# Altium PCB board.PcbDoc (part 2 of 2)
Units mil, origin at the board's own origin, x right, y up, seen from the top; angles counter-clockwise.
Board outline 6805.03 x 3220.03 mil, 2 copper layers (Top Layer, Bottom Layer); 97 components, 65 nets, 363 pads, 67 vias.
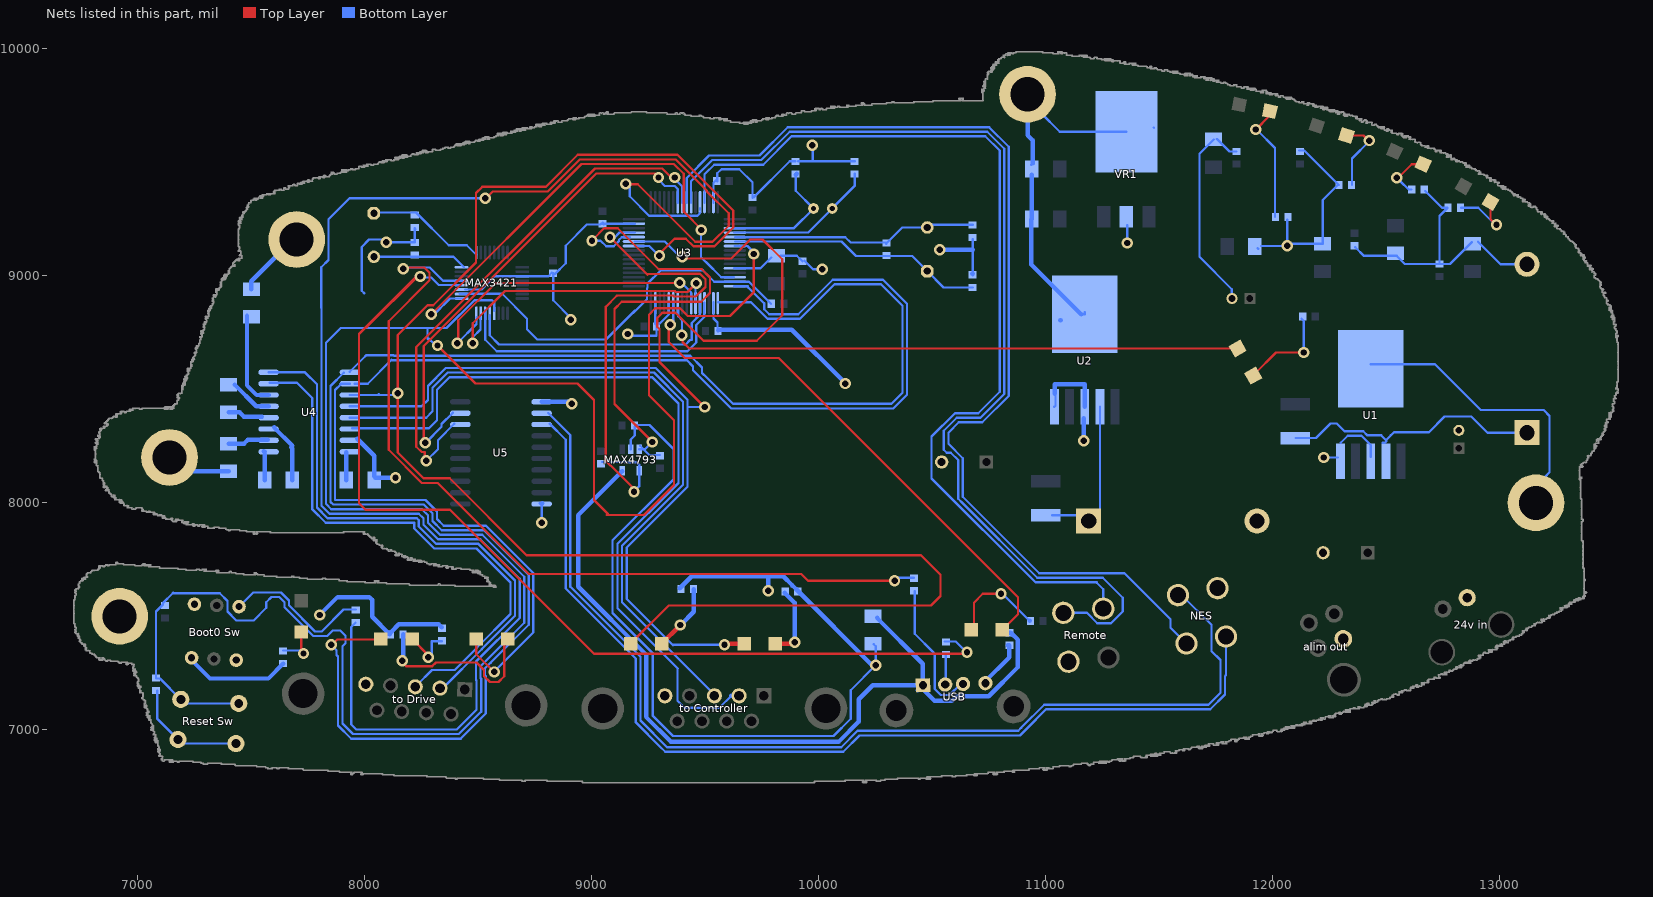
[diagram p2: the nets of this part, all layers, seen from the top]

## Via types
v1: diameter 50, hole 28, Top Layer to Bottom Layer, 67 vias

## Nets (pads, with @x,y where several pads share a name; then routed paths per layer and width w, separated by ;. In a path a pad name is that pad's centre, name@x,y a point inside that pad or via, vN(x,y) a via of type N, cw(c..) or ccw(c..) an arc to the next point about the centre after c; other vN are vias at no path point) (continued)
GND: "24v in.2" "alim out.3" "Boot0 Sw.1" "Boot0 Sw.6" "Reset Sw.1" "to Controller.5" "to Drive.5" C1.2 C2.2 C3.1 C4.2 C5.2 C6.2 C7.2 C8.1 C9.2 C10.2 C11.2 C12.1 C13.2 C14.1 C15.1 C16.1 C17.1 C18.1 C19.1 C20.1 C21.1 C22.1 C23.1 C24.1 C25.2 C26.2 C27.2 C29.2 C31.1 C32.2 C33.1 C34.2 C35.1 C36.2 C37.2 C38.2 D2.1 D4.1 MAX3421.3 MAX3421.19 MAX4793.2 NES.4 R1.1 R2.1 R3.1 R4.1 R7.1 R17.1 R18.1 R19.1 Remote.1 T1.1 T2.1 T3.1 T4.1 T5.1 U1.3 U1.5 U2.3 U2.5 U3.12 U3.18 U3.28 U3.31 U3.47 U3.63 U4.15 U5.1 U5.10 USB.4 VR1.2 | length 17597
  Bottom Layer w10: C17.1@7085,7173 7085,7049.27 7176.93,6957.33 ; 7188.48,6939.48 7432.21,6939.48 ; T3.1@7715,9212 T3.1@7735.44,9232.44 ; 7999.04,8921.76 7986,8934.8 7986,9127.6 8018.6,9160.2 8096.2,9160.2 v1@8098.7,9157.7 ; v1@8113.44,9147.56 C32.2@8220,9147.56 C34.2@8220,9203 ; C34.2@8220,9210 C34.2@8220,9203 ; C34.2@8222,9205 C34.2@8220,9203 ; MAX3421.19@8442.9,8939.7 8514.8,8939.7 8573.63,8998.53 8683.03,8998.53 8808.93,8998.53 C37.2@8823.9,9013.5 ; 8657.6,8999.3 8657.6,8998.5 MAX3421.3@8697.5,8998.5 ; U5.10@8770.1,7999.1 8779,7990.2 v1(8779,7912) ; C37.2@8830,9011.44 8830,8892.3 v1@8907.8,8814.5 ; C37.2@8838,9008 8885,9055 8885,9133 8977,9225 ; 8978,9226 9037,9226 9040.44,9229.44 C22.1@9048,9229.44 ; C22.1@9046,9232 C22.1@9049,9235 ; C22.1@9053,9227 9055.95,9229.95 U3.47@9189.5,9229.95 ; v1@9165,8736.56 9285.56,8736.56 C23.1@9285.56,8777 C23.1@9285.56,8788.56 ; MAX4793.2@9171.13,8236 9171.13,8279.13 9189,8297 C33.1@9189,8336 ; C33.1@9194,8343 9254,8343 9360,8237 9360,8103.16 9091.47,7834.63 9091.47,7514.49 9268.01,7337.95 9268.01,7062.92 9357.77,6973.16 10064.8,6973.16 10140.63,7048.99 10140.63,7174.63 v1(10251,7285) 10251,7368 C38.2@10242,7377 ; U3.31@9280.05,8883.5 9280.05,8787.95 C23.1@9283,8785 ; C23.1@9297.6,8788.4 9339.1,8829.9 U3.28@9339.1,8879.56 ; U3.28@9339,8842 U3.28@9339,8857 ; U3.18@9535.95,8883.5 9535.95,8812.05 9554,8794 C24.1@9554,8765 ; U3.63@9535.95,9320.5 9535.95,9409.95 C21.1@9548,9422 ; C21.1@9553,9417 9553,9452 9571,9470 9650,9470 9708,9412 C20.1@9708,9344.56 ; U3.12@9626.5,9033.1 9743.1,9033.1 C25.2@9791,9081 ; C20.1@9713,9345 9872.56,9504.56 C18.1@9898,9504.56 ; C25.2@9833,9089 9903.56,9089 C26.2@9928,9064.56 ; C18.1@9909.56,9504.56 9974,9504.56 ; C26.2@9937,9067 9975,9029 v1(10015,9029) ; v1@9974,9569 9974,9504.56 ; C19.1@10158,9504.56 9974,9504.56 ; C16.1@10678,9002 10678,9010 10678,9115 ; 10678,9122 10678,9115 ; C15.1@10678,9162 10678,9115 ; C36.2@10935,9488 C36.2@10942,9495 ; T2.1@10979,9718 11061.92,9635.08 VR1.2@11355,9635.08 ; U2.5@11037.81,8422.83 11043,8428.02 U2.5@11043,8481 ; U2.3@11155.69,8830.31 U2.3@11171.81,8830.31 U2.3@11171.81,8839.19 ; v1(11359,9145) VR1.2@11359,9224 ; VR1.2@11476,9654 VR1.2@11477,9653 ; C13.2@11740,9601.02 11677,9538.02 11677,9084 11820,8941 C9.2@11820,8909 ; C13.2@11754,9603 11809.44,9547.56 C14.1@11840,9547.56 ; C4.2@11933,9122 C4.2@11936,9119 ; C4.2@11949,9132 v1(12064,9132) R4.1@12064,9247 ; v1@12070,9148.05 12077.02,9141.02 C11.2@12220,9141.02 12220,9334 R3.1@12285,9399 ; C12.1@12116,9552 12138.47,9552 R3.1@12290.47,9400 ; v1(12225,8200) U1.5@12286,8200 ; 12300,8265 12330.59,8295.59 12390.71,8295.59 12431.81,8254.49 U1.3@12431.81,8202.83 ; C8.1@12364,9126 12402,9088 12546,9088 12581.44,9052.56 C3.1@12735,9052.56 ; U1.3@12431.81,8610.31 12714.95,8610.31 12916.33,8408.94 13193.63,8408.94 13219.8,8382.76 13219.8,8134.85 13197,8112.05 T1.1@13197,8057 ; R2.1@12672,9374 12746,9300 R1.1@12770.47,9300 ; R1.1@12770,9299 12735,9264 C3.1@12735,9052.56 ; C1.2@12878,9149 12781.56,9052.56 C3.1@12735,9052.56 ; C1.2@12904,9150 13003.13,9050.87 D2.1@13120,9050.87 ; T1.1@13125,7955 T1.1@13125,8010
  Bottom Layer w19.68: T5.1@7150,8180 7191.02,8138.98 C29.2@7400,8138.98 ; 7181,6932 7188.48,6939.48 ; C31.1@7500,8941.02 7500,8976 T3.1@7608,9084 ; T3.1@7751,9175 T3.1@7756,9170 ; v1@7803,7508 7880,7585 8020,7585 8033,7572 8033,7497.47 R17.1@8110.47,7420 ; U4.15@7967,8282 8041.02,8207.98 8041.02,8116.98 C27.2@8044,8114 ; C27.2@8045,8110 v1(8135,8110) ; R17.1@8115,7430 8150,7465 8325,7465 R19.1@8338,7452 ; U5.10@8779,7996 U5.10@8782,7999 ; U5.1@8779.13,8445 8893,8445 v1@8906,8432 ; R18.1@9387,7624 9440,7677 9777,7677 ; C24.1@9556,8760 9559,8763 9881.3,8763 v1@10111.3,8533 ; 9776,7676 9777,7677 ; v1(9778,7613) 9778,7677 ; v1@9974,9569 v1@9975,9570 ; v1@10249.8,7289.4 10230.13,7289.4 9909.53,7610 9884.09,7635.43 9884.09,7635.94 9843.03,7677 9778,7677 ; v1(10533,9115) 10671,9115 ; 10673,9115 10678,9115 ; C16.1@10676,9010 C16.1@10678,9010 ; USB.4@10728,7208 10840,7320 C35.1@10840,7372.44 C35.1@10833.59,7372.44 ; T2.1@10920,9800 10920,9620 10942,9598 C36.2@10942,9495 ; C5.2@10936,9249 10936,9141 10936,9050 U2.3@11155.69,8830.31 ; C5.2@10938.98,9250 C36.2@10938.98,9445.02 ; U2.5@11039,8481 11039,8520 ; 11040,8523 11171.81,8523 U2.3@11171.81,8422.83 ; U2.3@11063,8804 U2.3@11066,8804 ; v1(11167,8273) U2.3@11167,8373 ; 9777,7677 9778,7677 ; 9777,7677 9778,7678 9778,7677
  other v1: 7801,7506 8912,8436 10117,8525.4 9158,8744 8907.8,8807 8094,9148 9972,9575
Net3.3v_2: 3.3v.2 R1.2 | length 297.8
  Top Layer w10: 3.3v.2@12959.67,9325.55 12959.67,9249.33 v1@12990,9219
  Bottom Layer w10: R1.2@12829.53,9300 12905,9300 v1@12978,9227
  other v1: 12986,9225
Net5v_2: 5v.2 R2.2 | length 208.9
  Top Layer w10: v1@12544,9423 12612.98,9491.98 12649.38,9491.98 5v.2@12649.6,9492.2
  Bottom Layer w10: v1@12561,9418 12599,9380 12610.47,9380 R2.2@12601,9380
  other v1: 12547,9432
Net12v_2: 12v.2 R3.2 | length 338.2
  Top Layer w10: 12v.2@12325.53,9618.71 12400.29,9618.71 v1@12426,9593
  Bottom Layer w10: R3.2@12349.53,9400 12349.53,9517.53 v1@12427,9595
  other v1: 12426,9596
Net24v_2: 24v.2 R4.2 | length 545.7
  Top Layer w10: v1@11924,9643 v1@11926,9645 ; v1@11926,9642 11926,9643 v1@11926,9645 ; v1@11926,9664.28 v1@11926,9645 ; 24v.2@11987.39,9725.68 11987.39,9706.39 v1@11926,9645
  Bottom Layer w10: v1@11932,9642 12010.47,9563.53 R4.2@12010.47,9260
  other v1: 11925,9645
"NetBoot0 Sw_3": "Boot0 Sw.3" R10.1 | length 660.6
  Bottom Layer w10: 7448,7544 7509,7605 7630.85,7605 7666,7569.85 7666,7548.42 7780.85,7433.57 7810.57,7433.57 7906.53,7529.53 R10.1@7960,7529.53
"NetBoot0 Sw_4": "Boot0 Sw.4" R8.1 | length 473.2
  Bottom Layer w19.68: 7230,7314 7318,7226 7575.53,7226 R8.1@7640,7290.47
Netboot0_2: Boot0.2 R8.2 | length 200.6
  Top Layer w10: Boot0.2@7720,7431.1 v1@7720,7353 ; v1@7727,7345 7720,7352 v1@7720,7353 ; v1@7734,7339 7733.5,7339.5 v1@7720,7353
  Bottom Layer w10: R8.2@7640,7349.53 7715.47,7349.53 v1@7727,7338
  other v1: 7730,7336
NetC15_2: C15.2 R9.1 U3.5 Y1.2 | length 1095.9
  Bottom Layer w10: U3.5@9631,9170 10117,9170 10140.47,9146.53 R9.1@10298,9146.53 ; R9.1@10297,9142 10368.06,9213.06 Y1.2@10474.06,9213.06 ; Y1.2@10474,9213 Y1.2@10474.06,9213.06 ; Y1.2@10478,9213.06 Y1.2@10474.06,9213.06 ; C15.2@10678,9224.56 10485.56,9224.56 Y1.2@10474.06,9213.06
NetC16_2: C16.2 R9.2 U3.6 Y1.1 | length 1133.5
  Bottom Layer w10: U3.6@9631,9151 10100,9151 10163.53,9087.47 10298,9087.47 10411.53,9087.47 Y1.1@10480,9019 ; Y1.1@10478,9020.94 10549.94,8949 C16.2@10678,8949
NetC17_2: "Reset Sw.2" C17.2 MAX3421.12 R11.1 U3.7 | length 9492.8
  Top Layer w10: v1(8320,8693) 8487.6,8525.4 8937.1,8525.4 9009.9,8452.6 9009.9,8012.1 9071.2,7950.8 ; 9066,7946 9230,7946 9362,8078 9362,8364 9252,8474 9252,8829 9280,8857 9389,8857 9423,8823 9609,8823 9713,8927 v1(9713,9096)
  Bottom Layer w10: C17.2@7080,7227.56 7080,7521 7111,7552 7111,7559 7153.5,7601.5 ; C17.2@7085,7226 7097.36,7226 7189.29,7134.07 ; 7157,7605 7153.5,7601.5 ; 7213.78,7116.22 7444.57,7116.22 ; 7740.07,7446.07 7738.07,7448.07 ; 8281,8719 8276,8724 ; v1@8310,8696 8309,8696 8281,8724 8276,8724 ; MAX3421.12@8569.8,8846.4 8569.8,8883.7 8560.5,8893 8483,8893 8360,8770 8276,8770 ; U3.7@9630.44,9131.53 9686.07,9131.53 v1@9709.9,9107.7 ; U3.7@9651,9133 U3.7@9653,9131 ; 7153.5,7601.5 7361.22,7601.5 7395.06,7567.66 7395.06,7520.94 7434,7482 7510.72,7482 7566,7537.28 7566,7561.57 7589.43,7585 7622.57,7585 7646,7561.57 7646,7540.13 7738.07,7448.07 ; 7738.07,7448.07 7772.57,7413.57 7834,7413.57 7858.43,7438 7891.57,7438 7915,7414.57 7915,7381.43 7901.84,7368.27 7901.84,7027.57 7948.29,6981.13 8413.84,6981.13 8512.44,7079.73 8512.44,7225.26 8510,7227.7 8510,7279.85 8702.16,7472.01 8702.16,7674.14 8517.14,7859.16 8331.14,7859.16 8278.16,7912.14 8278.16,7945.27 8251.2,7972.24 7852.43,7972.24 7829,7995.67 7829,8705 7894,8770 8276,8770 ; 8276,8724 8276,8770
  Bottom Layer w19.68: 7198,7132 7213.78,7116.22
NetC18_2: C18.2 U3.3 Y2.1 | length 566.2
  Bottom Layer w10: U3.3@9626.5,9210.27 9891.27,9210.27 Y2.1@9973,9292 ; C18.2@9899,9445 9899,9374.66 Y2.1@9976.66,9297
  Bottom Layer w19.68: C18.2@9899,9445 C18.2@9903,9449
NetC19_2: C19.2 U3.4 Y2.2 | length 678.7
  Bottom Layer w10: U3.4@9626.5,9190.58 U3.4@9671.58,9190.58 ; U3.4@9665.91,9190.58 U3.4@9671.58,9190.58 ; U3.4@9673,9192 U3.4@9671.58,9190.58 ; Y2.2@10056,9294 10158,9396 C19.2@10158,9449.44 ; Y2.2@10057,9294 9953.58,9190.58 U3.4@9671.58,9190.58
NetC28_1: C28.1 U4.1 | length 119.6
  Bottom Layer w19.68: U4.1@7555,8228 U4.1@7558.98,8224.02 ; C28.1@7558.98,8100 U4.1@7558.98,8214.02
NetC28_2: C28.2 U4.3 | length 261.7
  Bottom Layer w19.68: U4.3@7600,8332 7681.02,8250.98 ; 7676,8245 7681.02,8239.98 C28.2@7681.02,8100
NetC29_1: C29.1 U4.2 | length 180
  Bottom Layer w19.68: C29.1@7400,8261.02 7468.02,8261.02 7485,8278 U4.2@7573,8278
NetC30_1: C30.1 U4.4 | length 154.9
  Bottom Layer w19.68: C30.1@7400,8398.98 7448.02,8398.98 7467,8380 U4.4@7547,8380
NetC30_2: C30.2 U4.5 | length 189.6
  Bottom Layer w19.68: C30.2@7426,8521 7522,8425 U4.5@7575.87,8425
NetC31_2: C31.2 U4.6 | length 419.3
  Bottom Layer w19.68: C31.2@7481,8824 7481,8517 7523,8475 U4.6@7575.87,8475
NetC32_1: C32.1 MAX3421.24 Y3.2 | length 420.4
  Bottom Layer w10: Y3.2@8040,9083.94 8391.06,9083.94 8391.85,9083.15 8395,9080 ; 8391.7,9083 MAX3421.24@8436.8,9037.9
NetC34_1: C34.1 MAX3421.25 Y3.1 | length 528.8
  Bottom Layer w10: Y3.1@8041,9279 8225,9279 8369.65,9134.35 8449.35,9134.35 ; 8448.6,9135.1 8449.35,9134.35 ; 8449.76,9134.35 8449.35,9134.35 ; MAX3421.25@8491.1,9092.6 8449.35,9134.35
NetC35_2: C35.2 C38.1 MAX4793.5 USB.1 | length 3803.5
  Bottom Layer w19.68: MAX4793.5@9134,8140 8940,7946 8940,7630.83 9239.09,7331.73 9239.09,7095 9239.09,7056.7 9347.48,6948.32 10088.78,6948.32 10176.69,7036.22 10176.69,7135 10237.65,7195.97 USB.1@10458.75,7195.97 ; C38.1@10257,7493 10458.75,7291.25 USB.1@10458.75,7195.97 ; USB.1@10436.33,7173.55 USB.1@10458.75,7195.97 ; USB.1@10454,7184 10509.93,7128.07 10586.67,7128.07 10606.67,7148.07 10749.26,7148.07 10877.56,7276.37 10877.56,7396.41 10846.41,7427.56 C35.2@10840,7427.56
NetCtrl-Rx_2: Ctrl-Rx.2 R7.2 | length 315.7
  Top Layer w19.68: Ctrl-Rx.2@9808.9,7380 9888,7380 v1@9889,7379
  Bottom Layer w19.68: R7.2@9850,7603 9894,7559 v1(9894,7386)
NetCtrl-Tx_2: Ctrl-Tx.2 R18.2 | length 295.4
  Top Layer w19.68: Ctrl-Tx.2@9308.9,7380 9387.9,7459 v1@9394,7459
  Bottom Layer w19.68: v1@9395,7465 9449.53,7519.53 R18.2@9449.53,7620
  other v1: 9390,7462
NetD2_2: D2.2 L1.1 U1.2 | length 1174
  Bottom Layer w10: L1.1@12100,8285.2 12190.2,8285.2 12255,8350 12281.88,8350 12316.28,8315.59 12398.99,8315.59 12417.43,8297.16 12477.84,8297.16 12500,8275 ; 12485,8265 12495,8265 12501,8271 12501,8278 12520.16,8297.16 12534.16,8311.16 12688.29,8311.16 12757.13,8380 12875,8380 12945.87,8309.13 D2.2@13120,8309.13
NetD4_2: D4.2 L2.1 U2.2 | length 596.2
  Bottom Layer w10: L2.1@11028,7945.2 D4.2@11170.2,7945.2 ; D4.2@11238.81,7968.81 U2.2@11238.81,8422.83
"NetDrv Rx_2": "Drv Rx.2" R19.2 | length 242.7
  Top Layer w10: 8208.9,7400 8281,7327.9 v1@8281,7314
  Bottom Layer w10: v1@8278,7316 8294.47,7332.47 8294.47,7390.47 R19.2@8340,7390.47
  other v1: 8280,7320
NetDrv-Tx_2: Drv-Tx.2 R17.2 | length 815.9
  Top Layer w10: v1@8163,7299 8182,7280 8296.57,7280 8313.57,7297 8491.87,7297 8525.16,7263.71 8525.16,7236.43 8551.43,7210.16 8588.57,7210.16 8614.84,7236.43 Drv-Tx.2@8614.84,7385.94
  Top Layer w19.68: Drv-Tx.2@8614.84,7385.94 Drv-Tx.2@8628.9,7400
  Bottom Layer w19.68: v1(8165,7305) 8169.53,7309.53 R17.2@8169.53,7420
NetFault_1: Fault.1 R6.1 | length 422.3
  Top Layer w10: Fault.1@10684,7446 10684,7560 10723,7599 v1(10803,7599)
  Bottom Layer w10: v1@10810,7598 v1@10810,7599 ; v1@10810,7600 v1@10810,7599 ; R6.1@10929,7480 v1@10810,7599
  Bottom Layer w19.68: v1@10809,7600 v1@10810,7599 ; R6.1@10929,7480 R6.1@10930.47,7480
NetFault_2: Fault.2 U3.27 | length 2351
  Top Layer w10: v1@9339,8779 9339,8709 9410,8638 9824,8638 10878,7584 10878,7509.1 Fault.2@10808.9,7440
  Bottom Layer w10: v1@9347,8785 9358.79,8796.79 U3.27@9358.79,8883.5
  other v1: 9346,8784
NetHeartbeat_1: Heartbeat.1 R5.1 | length 407.7
  Top Layer w10: Heartbeat.1@11921,8569 12014,8662 v1(12137,8662)
  Bottom Layer w10: R5.1@12127,8811 12137,8801 v1(12137,8662)
NetHeartbeat_2: Heartbeat.2 U3.26 | length 2600.1
  Top Layer w10: v1@9400,8733 9400,8709 9429.33,8679.67 Heartbeat.2@11836.33,8679.67
  Bottom Layer w10: U3.26@9381,8859 9381,8822 9397,8806 v1(9397,8738)
NetMAX3421_20: MAX3421.20 R14.1 | length 4702.9
  Top Layer w10: 8009,8774 v1@8236,9001 ; v1@8239,9004 v1@8236,9001 ; v1@8240.6,9001 v1@8236,9001 ; v1(10653,7342) 10646,7335 9009.5,7335 8375,7969.5 8002.8,7969.5 7974.6,7997.7 7974.6,8743.6 8232,9001 v1@8236,9001
  Bottom Layer w10: v1@8252,8993 8293,8993 8325.8,8960.2 MAX3421.20@8423.3,8960.2 ; R14.1@10554,7389 10604,7389 10651,7342 v1(10653,7342)
  other v1: 8245,8997
NetMAX3421_21: MAX3421.21 R15.1 | length 3821.2
  Top Layer w10: v1@8172.8,9044.8 8172.8,9041.4 8177.2,9037 8261.57,9037 8285,9013.57 8285,8980.43 8105,8800.43 8105,8233.52 8250.72,8087.8 8321.48,8087.8 8722.64,7686.64 9923.36,7686.64 9953,7657 v1(10334,7657)
  Bottom Layer w10: v1@8174,9037 8286,9037 8344.1,8978.9 8427.1,8978.9 MAX3421.21@8413.7,8978.9 ; v1@10342,7662 10349.53,7669.53 R15.1@10420,7669.53
  other v1: 8170,9032
NetNES_1: NES.1 U3.57 | length 4680.3
  Bottom Layer w10: 9417,9427 9417,9429 ; U3.57@9417.84,9320.5 9417.84,9428.16 9417,9429 ; 10837,9532 10837,9527 ; NES.1@11620,7380 11550,7450 11550,7486.87 11347.08,7689.79 10971.12,7689.79 10634.53,8026.38 10634.53,8196.71 10571.16,8260.08 10571.16,8309.29 10616.71,8354.84 10720.75,8354.84 10837,8471.09 10837,9527 ; 9417,9429 9417,9430.28 9516.72,9530 9738.72,9530 9863.72,9655 10750.57,9655 10837,9568.57 10837,9527
NetNES_2: NES.2 U5.2 | length 4741.5
  Bottom Layer w10: U5.2@8808,8396 8904.84,8299.16 8904.84,7630.85 9214.25,7321.44 9214.25,7040.63 9331.41,6923.47 10099.07,6923.47 10170.92,6995.32 10378.88,6995.32 10379.56,6996 10879,6996 10892.63,7009.63 ; 10894.52,7012 10993.28,7110.76 11716.76,7110.76 11769.63,7163.63 11769.63,7307.18 11730.26,7346.55 11730.26,7462.74 NES.2@11599.75,7593.25
  Bottom Layer w19.68: NES.2@11582.4,7593.25 NES.2@11599.75,7593.25
NetNES_3: NES.3 U5.3 | length 4485
  Bottom Layer w10: U5.3@8814,8349 8884.84,8278.16 8884.84,7622.57 9194.25,7313.16 9194.25,7032.35 9300.8,6925.8 9323.13,6903.47 10107.36,6903.47 10179.21,6975.32 10886.6,6975.32 10912.63,7001.34 10912.63,7001.83 11001.56,7090.76 11725.05,7090.76 11789.63,7155.35 11789.63,7236.16 11794.47,7241 NES.3@11794.47,7410.76
NetR10_2: R10.2 U3.60 | length 7065.3
  Top Layer w10: v1@8533,9341 8564,9372 8805.72,9372 8946.72,9513 9369.85,9513 9507,9375.85 9507,9372 9603,9276 9603,9221 9532,9150 9456,9150 9202,9404 v1@9146,9404
  Bottom Layer w10: 7808,8860 7808,9038.01 7840,9070.01 7840,9249 7933,9342 v1(8530,9342) ; 7809,8874 7809,7987.38 7844.15,7952.24 8237.76,7952.24 8258.16,7931.84 8258.16,7903.86 8322.86,7839.16 8508.86,7839.16 8682.16,7665.86 8682.16,7492.87 8490,7300.72 8490,7219.42 8492.44,7216.98 8492.44,7088.01 8405.56,7001.13 7962,7001.13 7940,7023.13 7940,7453 R10.2@7959,7472 ; v1@9156,9402 9167,9391 9167.3,9353.7 ; 9167.3,9360.3 9167.3,9350.29 9253.36,9264.23 9464.21,9264.23 9474.12,9274.13 9474.12,9275.82 U3.60@9477.7,9279.4 ; U3.60@9476.7,9290.34 U3.60@9476.7,9298.3
  other v1: 9150,9405
NetR14_2: R14.2 USB.2 | length 130.9
  Bottom Layer w10: USB.2@10559,7200 10560,7201 R14.2@10560,7330.47
NetR15_2: R15.2 USB.3 | length 624.3
  Bottom Layer w10: R15.2@10423,7612 10423,7422.73 10505,7340.73 ; 10505,7340 10510.62,7334.38 10510.62,7180.15 10537.86,7152.91 10576.38,7152.91 10625.62,7202.15 USB.3@10635.81,7202.15
NetRemote_2: Remote.2 U3.58 | length 4623.9
  Bottom Layer w10: U3.58@9437.53,9320.5 9437.53,9416.53 9449,9428 ; 9442.72,9422 9530.72,9510 9747,9510 9872,9635 10742.28,9635 10817,9560.28 10817,8479.37 10712.47,8374.84 10608.43,8374.84 10551.16,8317.57 10551.16,8233.39 10563.57,8220.98 10581.98,8220.98 10614.53,8188.43 10614.53,8018.09 10633.81,7998.81 10962.83,7669.79 11251.21,7669.79 11339,7582 11339,7521 11287.66,7469.66 11226.96,7469.66 11181.27,7515.35 Remote.2@11077.37,7515.35
NetRemote_4: Remote.4 U3.61 | length 4200.1
  Bottom Layer w10: U3.61@9496.58,9320.5 9496.58,9447.58 9503,9454 ; 9500,9451 9503,9454 ; 10497,8291.7 10497.05,8291.75 ; 10497,8292 10497.05,8291.95 10497.05,8291.75 ; 11223.21,7649.79 10954.55,7649.79 10497.05,8107.29 10497.05,8264 10497.05,8280.48 10497.05,8291.75 ; 11225,7649.79 11225,7648 11253.56,7619.44 Remote.4@11253.56,7533.87 ; 9503,9454 9539,9490 9755.28,9490 9880.28,9615 10734,9615 10797,9552 10797,8488.84 10703,8394.84 10600.14,8394.84 10497.05,8291.75
"Netto Controller_2": "to Controller.2" U4.14 | length 3508.9
  Bottom Layer w10: U4.14@7944,8328 8282,8328 8318.16,8364.16 8318.16,8498.29 8373.71,8553.84 9265.29,8553.84 9381.84,8437.29 9381.84,8087.71 9113.54,7819.41 9113.54,7535.46 9379,7270 ; 9377.83,7270.11 9377.83,7127.92 9408.95,7096.81 9562,7096.81 9615.11,7149.92
  Bottom Layer w19.68: 9615.11,7149.92 9649.06,7149.92 9635.08,7149.92
"Netto Controller_3": "to Controller.3" U4.13 | length 3221.2
  Bottom Layer w10: U4.13@7934.13,8375 8270.16,8375 8298.16,8403 8298.16,8506.57 8365.43,8573.84 9273.57,8573.84 9401.84,8445.57 9401.84,8079.43 9133.54,7811.13 9133.54,7561.46 9531,7164
"Netto Drive_2": "to Drive.2" U4.8 | length 2438.7
  Bottom Layer w10: U4.8@7575.87,8575 7735,8575 7740,8570 ; 7739,8572 7789,8522 7789,7979.1 7835.86,7932.24 8229.48,7932.24 8238.16,7923.56 8238.16,7895.57 8314.57,7819.16 8500.57,7819.16 8662.16,7657.57 8662.16,7502.44 8515.43,7355.71 8515.43,7354.43 8347,7186 8326,7186 ; 8342,7196 8342,7209
"Netto Drive_3": "to Drive.3" U4.7 | length 2419.4
  Bottom Layer w10: U4.7@7580,8529 7701,8529 7769,8461 7769,7970.82 7827.58,7912.24 8218.16,7912.24 8218.16,7887.29 8306.29,7799.16 8492.29,7799.16 8642.16,7649.29 8642.16,7510.73 8495.43,7364 8495.43,7362.71 8395.72,7263 8296,7263 8229,7196 ; U4.7@7593,8529 U4.7@7593.25,8529
  Bottom Layer w19.68: 8226,7194 8226,7201.98
NetU3_55: U3.55 U5.19 | length 2156.3
  Top Layer w10: v1@8260,8269 8260,8691 9020,9451 9280,9451 v1@9287,9444
  Bottom Layer w10: v1(8267,8264) 8338.16,8335.16 8338.16,8347.16 U5.19@8388,8397 ; v1@9278,9433 v1(9294,9433) ; v1@9296.8,9420.8 9321.9,9395.7 9365.1,9395.7 9378.47,9382.33 U3.55@9378.47,9324.44 ; U3.55@9378.47,9320.5 U3.55@9378.47,9355.53
NetU3_56: U3.56 U5.18 | length 2336
  Top Layer w10: v1@8264,8182 8264,8223.14 8263.14,8224 8250.43,8224 8227,8247.43 8227,8686.28 9013.72,9473 9310.57,9473 9350.57,9433 v1(9365,9433)
  Bottom Layer w10: v1(8271,8185) 8322,8236 8322,8276 U5.18@8394,8348 ; v1@9369,9423 9398.16,9393.84 U3.56@9398.16,9320.5
PA0-SPI-GPX: MAX3421.17 U3.14 | length 2178.6
  Top Layer w10: v1(8293,8831) 8955,9493 9361.57,9493 9405,9449.57 9405,9283 v1@9489,9199
  Bottom Layer w10: v1@8303,8828 8333.76,8858.76 ; v1@8315.1,8839.9 8375.3,8900.1 MAX3421.17@8436.97,8900.1 ; v1@9485,9197 9481,9193 9481,9082 9502,9061 9503,9061 9570.27,8993.73 U3.14@9626.5,8993.73
  other v1: 9482,9202
PA1-SPI-INT: MAX3421.18 R16.1 U3.15 | length 1731.2
  Bottom Layer w10: MAX3421.18@8418.7,8921 8605.4,8921 8714.9,8811.5 8714.9,8764.4 8759.9,8719.4 9063.1,8719.4 9190.8,8847.1 ; 9183.94,8836.94 9243.46,8896.46 9243.46,8945.04 9245.77,8947.36 9245.77,8966.17 9304.6,9025 9382.5,9025 ; 9372.1,9025 9382.5,9025 ; R16.1@9790,8877 9692.95,8974.05 9626.5,8974.05 9539.58,8974.05 9488.63,9025 9382.5,9025
PA2-TX-2: Drv-Tx.1 U3.16 U4.10 | length 6229.2
  Top Layer w10: Drv-Tx.1@8491.1,7400 8491.1,7332.9 v1@8572,7252
  Bottom Layer w10: U4.10@7894.24,8525 U4.10@7897,8525 ; U4.10@7934.13,8525 7905,8525 U4.10@7897,8525 ; U4.10@7956,8525 8013,8525 8118,8630 8120,8628 9419.03,8628 9446.29,8600.74 9446.29,8583.86 9496.52,8533.62 ; 8170.27,8012.24 8164,8012.24 ; v1@8569,7256 8742.16,7429.16 8742.16,7690.71 8533.71,7899.16 8347.71,7899.16 8318.16,7928.71 8318.16,7961.84 8267.76,8012.24 8164,8012.24 ; 9501.15,8529 9496.52,8533.62 ; U3.16@9626.5,8954.36 9687.33,8954.36 9687.33,8950.37 9759.5,8878.2 ; 9759.69,8879.02 9759.69,8853.07 9782.06,8830.7 9909.1,8830.7 10061.1,8982.7 10282.8,8982.7 10388.9,8876.6 10388.9,8476.2 10328.7,8416 9614.15,8416 9496.52,8533.62 ; U4.10@7897,8525 7869,8497 7869,8012.24 8164,8012.24
  other v1: 8570,7255
PA3-RX-2: "Drv Rx.1" U3.17 U4.9 | length 7540.3
  Top Layer w10: v1@7863,7382 7879,7398 8053,7398
  Bottom Layer w10: v1@7852,7374 7875,7351 7875,7330 7881.84,7323.16 7881.84,7019.29 7940,6961.13 8422.13,6961.13 8532.44,7071.44 8532.44,7235.99 8530,7238.43 8530,7271.57 8553.43,7295 8554.28,7295 8722.16,7462.87 8722.16,7682.43 8525.43,7879.16 8339.43,7879.16 8298.16,7920.43 8298.16,7953.56 8259.48,7992.24 8134,7992.24 ; U4.9@7907,8573 7849,8515 7849,8003.95 7860.72,7992.24 8134,7992.24 ; U4.9@7934,8578 8002,8646 ; 8001,8646 8005,8650 8126.28,8650 8128.28,8648 9433.87,8648 9486,8595.87 9486,8572.43 9509.43,8549 ; 8161.98,7992.24 8134,7992.24 ; 9509.52,8548.92 9622.43,8436 10320.42,8436 10368.9,8484.48 10368.9,8868.32 10274.52,8962.7 10069.38,8962.7 9917.38,8810.7 9773.78,8810.7 9700.98,8883.5 U3.17@9555.64,8883.5
  other v1: 7852,7375
PA4-SPI-SS: MAX3421.14 U3.20 | length 1283.9
  Bottom Layer w10: MAX3421.14@8530.5,8848 8530.5,8718.5 8581,8668 9421.6,8668 9461.1,8707.5 ; 9460,8709.34 9460,8783 9496,8819 U3.20@9496,8881
PA5-SPI-SCLK: MAX3421.13 U3.21 | length 1183.8
  Bottom Layer w10: MAX3421.13@8550,8826.4 8550,8738.7 8590.7,8698 9413.57,8698 9433.2,8717.63 9440,8717.63 9440,8792.63 9476.9,8829.53 U3.21@9476.9,8883.5
PA6-SPI-MISO: MAX3421.15 U3.22 | length 1353.2
  Top Layer w10: v1@8476,8709 8476,8791 8618,8933 9366.43,8933 9370.43,8929 9422,8929 v1(9461,8968)
  Bottom Layer w10: v1(8476,8703) 8476,8730 8510.1,8764.1 MAX3421.15@8510.1,8825.4 ; v1@9456,8956 9457.21,8954.79 U3.22@9457.21,8883.5
PA7-SPI-MOSI: MAX3421.16 U3.23 | length 1375.4
  Top Layer w10: v1@8412,8716 8412,8804 8577,8969 v1(9387,8969)
  Bottom Layer w10: v1(8407,8703) 8491.6,8787.6 MAX3421.16@8491.6,8819.2 ; v1@9403,8962 9437.53,8927.47 U3.23@9437.53,8883.5
PA9-TX-1: Ctrl-Tx.1 U3.42 U4.11 | length 7590.6
  Top Layer w10: v1@8152,8479 v1@8145,8479 ; 8711.4,7770.5 8374.1,8107.8 8259,8107.8 8145,8221.8 v1@8145,8479 ; 8712.9,7769.1 10450.7,7769.1 10536.4,7683.4 10536.4,7589.5 10495,7548.1 9339.2,7548.1 Ctrl-Tx.1@9171.1,7380 Ctrl-Tx.1@9171.1,7383.1 ; v1@9295,9094 9364.81,9163.81 9413.91,9163.81 9447.72,9130 9540.28,9130 9623,9212.72 9623,9288.14 9378.14,9533 8938.43,9533 8797.43,9392 8517.43,9392 8490,9364.57 8490,9059 8302,8871 8276.43,8871 8145,8739.57 v1(8145,8483) v1@8145,8479
  Bottom Layer w10: U4.11@7934.13,8475 8059,8475 ; 8062,8478 8059,8475 ; v1@8141,8489 8127,8475 8059,8475 ; U3.42@9189.5,9131.53 9253.47,9131.53 v1@9293,9092
  other v1: 9298,9088
PA10-RX-1: Ctrl-Rx.1 U3.43 U4.12 | length 5458.7
  Top Layer w10: v1@9409,9082 9415,9076 9614,9076 9698,9160 9752,9160 9839,9073 9839,8826 9727,8714 9492,8714 9369,8837 9311,8837 9288,8814 9288,8776 9298,8766 9298,8621 v1(9497,8422)
  Top Layer w19.68: v1@9585,7380 Ctrl-Rx.1@9671.1,7380
  Bottom Layer w10: U4.12@7934.13,8425 8250,8425 8278.16,8453.16 8278.16,8514.86 ; 8278.16,8486.87 8278.16,8514.86 ; U3.43@9189.5,9151.21 9321.79,9151.21 v1@9389,9084 ; 9356.9,7375 v1(9585,7375) ; 9358,7372 9153.54,7576.46 9153.54,7802.84 9421.84,8071.14 9421.84,8422 ; v1@9494,8420 9492,8422 9421.84,8422 ; 8278.16,8514.86 8357.14,8593.84 9281.86,8593.84 9421.84,8453.86 9421.84,8422
  other v1: 9399,9084
PA11-VBUS5V: MAX4793.3 R12.1 U3.44 | length 2188.6
  Top Layer w10: v1(9001,9155) v1@9014.09,9155 ; v1@9006,9161.7 9054.3,9210 9114,9210 9295.05,9028.95 ; v1@9275,8260 v1(9267,8268) 9100,8435 9100,8854 9131.7,8885.7 9482.6,8885.7 9521.3,8924.4 9521,8924.7 9521,8992.85 9484.25,9029.6 ; 9295.7,9028.5 9294.1,9030.1 9483.8,9030.1 9483.9,9030.2
  Bottom Layer w10: v1(9001,9155) 9038.43,9155 9063.43,9130 9096.57,9130 9120,9153.43 9120,9158.58 9132,9170.58 9166.42,9170.58 U3.44@9167,9170 ; MAX4793.3@9208.53,8236 9228,8236 ; MAX4793.3@9213,8251 9228,8236 ; v1@9260,8262 9234,8236 9228,8236 ; R12.1@9299.47,8210.53 9253.47,8210.53 9228,8236
PA12-VBUS0L: MAX4793.4 R13.1 U3.45 | length 2316.6
  Top Layer w10: 9060.5,8185.9 9082.4,8164 9084,8164 v1@9198,8050 ; 9062.1,8186 9062.1,8864.4 9110.2,8912.5 ; v1@9080,9151 v1(9080,9170) 9245,9005 9248.5,9008.5 9303.98,9008.5 9304.48,9009 9476.57,9009 9501,8984.57 9501,8951.43 9458.57,8909 9362.15,8909 9358.15,8913 9112.8,8913 ; 9110.2,8913 9110.2,8912.5 ; 9110.7,8913 9110.2,8912.5
  Bottom Layer w10: R13.1@9046,8180 9144.16,8180 9144.82,8179.35 9198,8179.35 9208.53,8168.82 MAX4793.4@9208.53,8141.51 9208.53,8073.53 v1@9193,8058 ; v1@9070,9165 9097,9165 9122.58,9190.58 U3.45@9189.5,9190.58
  other v1: 9186,8049
VCC: C27.1 U4.16 | length 122
  Bottom Layer w19.68: C27.1@7918.98,8100 U4.16@7918.98,8221.98
pads on no net: "24v in.3" "24v in.4" "alim out.5" "Boot0 Sw.5" "to Controller.1" "to Controller.4" "to Controller.6" "to Controller.7" "to Controller.8" "to Controller.9" "to Controller.10" "to Controller.11" "to Drive.1" "to Drive.4" "to Drive.6" "to Drive.7" "to Drive.8" "to Drive.9" "to Drive.10" "to Drive.11" MAX3421.1 MAX3421.4 MAX3421.5 MAX3421.6 MAX3421.7 MAX3421.8 MAX3421.9 MAX3421.10 MAX3421.11 MAX3421.22 MAX3421.26 MAX3421.27 MAX3421.28 MAX3421.29 MAX3421.30 MAX3421.31 MAX3421.32 U3.2 U3.8 U3.9 U3.10 U3.11 U3.24 U3.25 U3.29 U3.30 U3.33 U3.34 U3.35 U3.36 U3.37 U3.38 U3.39 U3.40 U3.41 U3.46 U3.49 U3.50 U3.51 U3.52 U3.53 U3.54 U3.59 U3.62 U5.4 U5.5 U5.6 U5.7 U5.8 U5.9 U5.12 U5.13 U5.14 U5.15 U5.16 U5.17 USB.5 USB.6

## Polygon pours and split planes (outlines as drawn)
GND on Top Layer "Ground-plane" (solid, pour order 1000): 207 vertices, not listed, extent 6765,6800 13475,9955

## Silkscreen, mask and mechanical layers (free items; w line width, h text height)
Top Overlay:
  drawing of 3491 lines, arcs and shapes, not listed
  text "d" at 12871.91,9203.18 h124.11
  text "," at 13285.3,8966.96 h124.11
  text "Rx" at 7904,7373 h60
  text "Tx" at 8714,7365 h60
  text "Tx" at 8983,7357 h60
  text "Rx" at 9934,7357 h60
Top Paste:
  region: 7471.5,9280.9 7513.2,9327.2 7590.4,9362.8 7744.9,9412.2 7902.5,9452.4 8121.9,9504.9 8608.6,9625.5 8842,9676.4 9101.5,9712 9232.9,9716.6 9441.4,9701.2 9545,9690.3 9676.3,9661 9799.9,9696.5 10000.8,9727.4 10183.1,9749.1 10278.9,9755.2 10377.8,9761.4 10557,9766.1 10723.9,9766.1 10734.7,9864.9 10787.2,9948.4 10859.8,9987 11029.8,9977.7 11207.5,9951.5 11474.8,9906.7 11620,9877.3 11706.6,9860.3 11796.2,9843.3 11893.5,9824.8 12058.8,9783 12180.9,9755.2 12312.2,9710.4 12413.5,9679.4 12504.1,9648 12584.2,9612 12663.1,9576.1 12756,9533.1 12888.3,9464.6 13020.7,9383.3 13110,9323 13223.8,9234.8 13320.2,9138.4 13396.8,9035.1 13442,8946.9 13475.7,8859.8 13507,8772.7 13518.7,8685.7 13521,8581.2 13511.7,8487.2 13490.3,8390.9 13447.8,8282.9 13403.7,8208.6 13350.3,8159.8 13373.6,7589.8 13252.8,7513.2 13169.9,7464.4 13086.9,7405.8 12938.1,7330.2 12762.4,7244.8 12672.1,7208.2 12569.6,7164.3 12486.6,7132.6 12406.1,7105.7 12343.5,7091.2 12291.1,7077.4 12252.6,7065 12207.1,7055.4 12182.3,7045.7 12128.6,7034.7 12090.3,7025.9 12006.3,7000.3 11825.3,6960.9 11664.8,6924.6 11559.7,6904.5 11454.7,6889.1 11249.2,6862.8 11063.8,6836.5 10847.5,6814.9 10604.9,6796.4 10292.8,6780.9 9782.9,6763.9 9322.4,6760.8 8871.3,6773.2 8038.5,6799.4 7658.4,6831.9 7210.3,6858.2 7116,6861.2 7096,6903 7074.3,6987.9 7046.5,7091.5 7015.6,7184.2 6983.2,7270.7 6967.7,7300.1 6853.4,7304.7 6811.7,7326.3 6779.2,7357.2 6749.9,7394.3 6732.9,7431.4 6715.9,7507.1 6720.5,7581.3 6737.5,7630.7 6776.1,7675.5 6824,7711 6890.5,7725 6964.6,7721.9 7085.1,7709.5 7225.8,7694.1 7624.4,7670.9 7876.2,7652.3 8217.7,7636.9 8458.7,7627.6 8554.5,7626.1 8571.5,7638.4 8537.5,7677.1 8478.8,7703.3 8367.6,7715.7 8250.1,7745 8185.3,7765.1 8114.2,7794.5 8060.1,7830 7999.9,7868.7 7607.4,7870.2 7406.6,7890.3 7222.7,7910.4 7057.4,7949 6921.4,8004.6 6878.1,8047.9 6848.8,8091.2 6828.7,8142.2 6819.4,8196.2 6824.1,8258 6841.1,8313.7 6881.2,8358.5 6926,8392.5 6978.6,8407.9 7043.5,8414.1 7134.6,8404.8 7185.6,8448.1 7272.1,8698.4 7338.6,8914.7 7394.2,9009 7462.2,9078.5 7443.6,9134.1 7443.6,9188.2 7451.4,9239.2
Mechanical 1:
  text "," at 12413.13,9597.66 h124.11

## Text inside footprints (layer, text, board x,y; h text height)
C2: Bottom Overlay "+" at 12790.47,8123.5 h59.06 r270
C6: Bottom Overlay "+" at 12574.88,7750.47 h59.06
C9: Bottom Overlay "+" at 12016.5,8870.47 h59.06
C10: Bottom Overlay "+" at 10894.53,8150.47 h59.06
"to Controller": Top Overlay "9" at 9396.1,6915.87 h59.06 r180; Top Overlay "6" at 9723.27,6915.87 h59.06 r180
"to Drive": Top Overlay "6" at 8393.27,6946.01 h59.06 r177; Top Overlay "9" at 8066.55,6963.13 h59.06 r177